# EAGLE board express 2 - 2020-01-19 (EAGLE 9.5.1), part 1 of 2
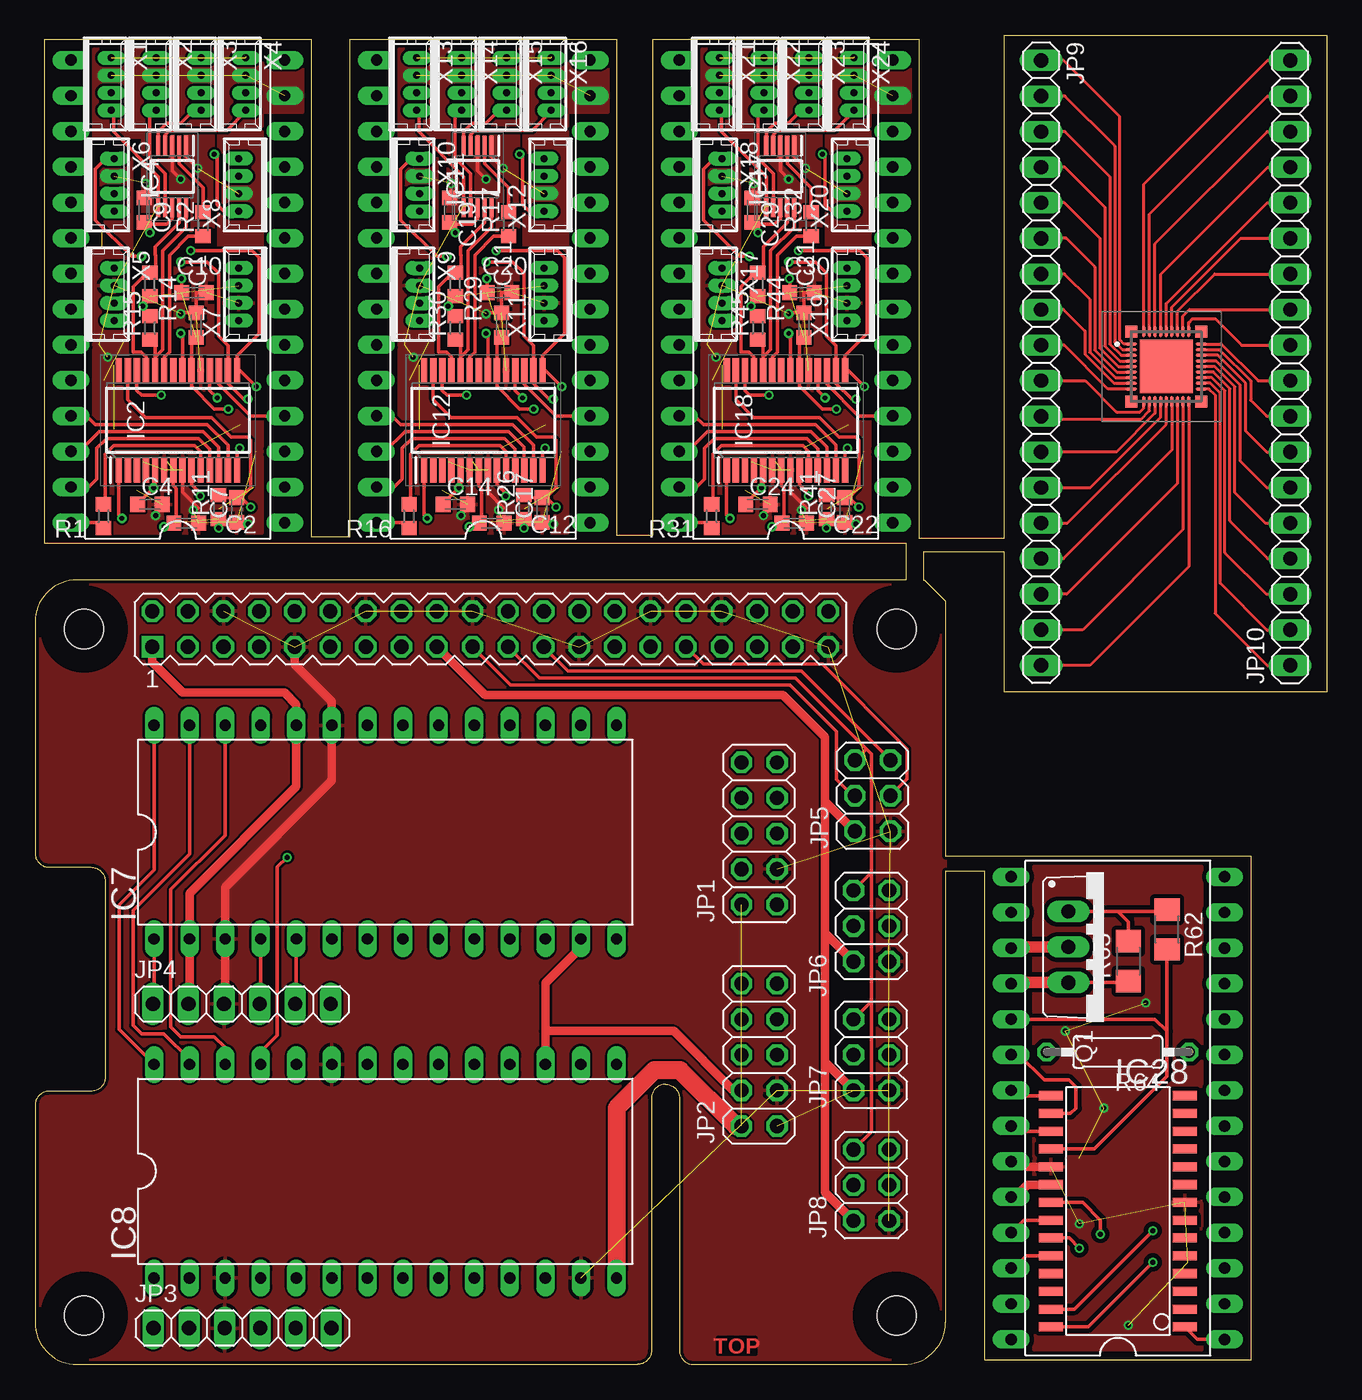
[diagram p0: board, top side]
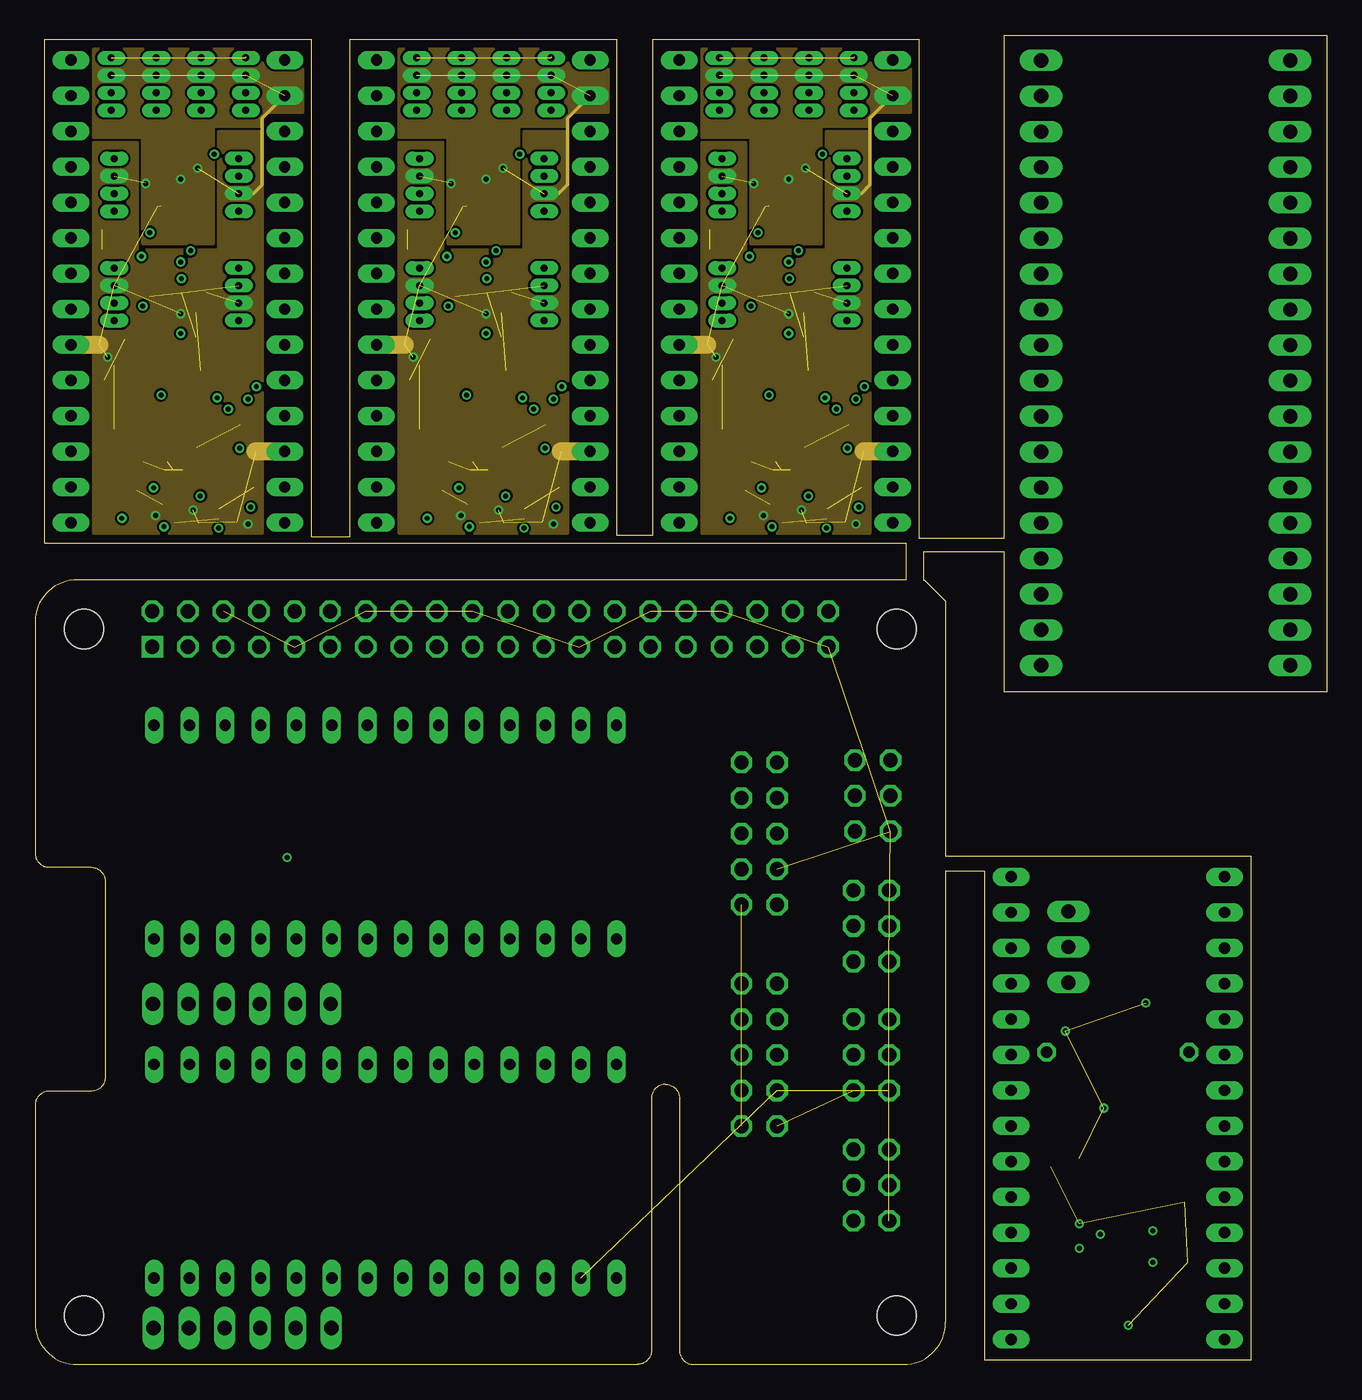
[diagram p1: board, inner layer GND]
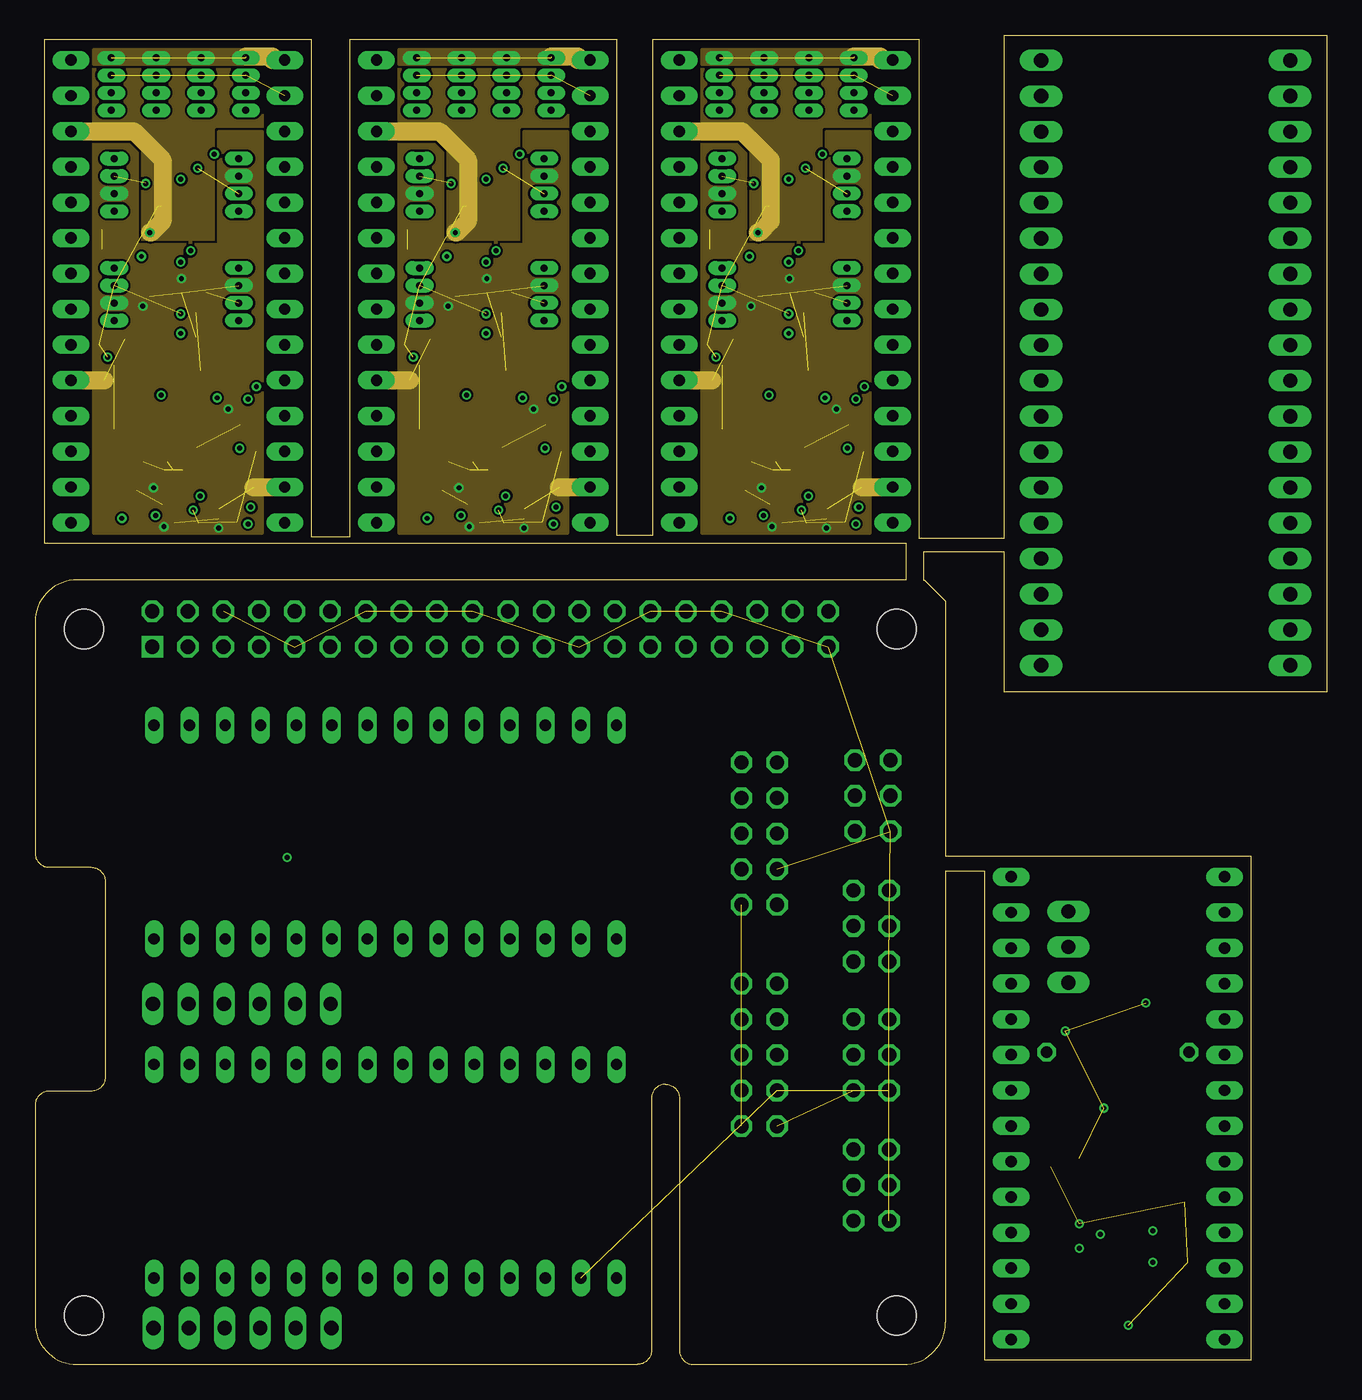
[diagram p2: board, inner layer POWER]
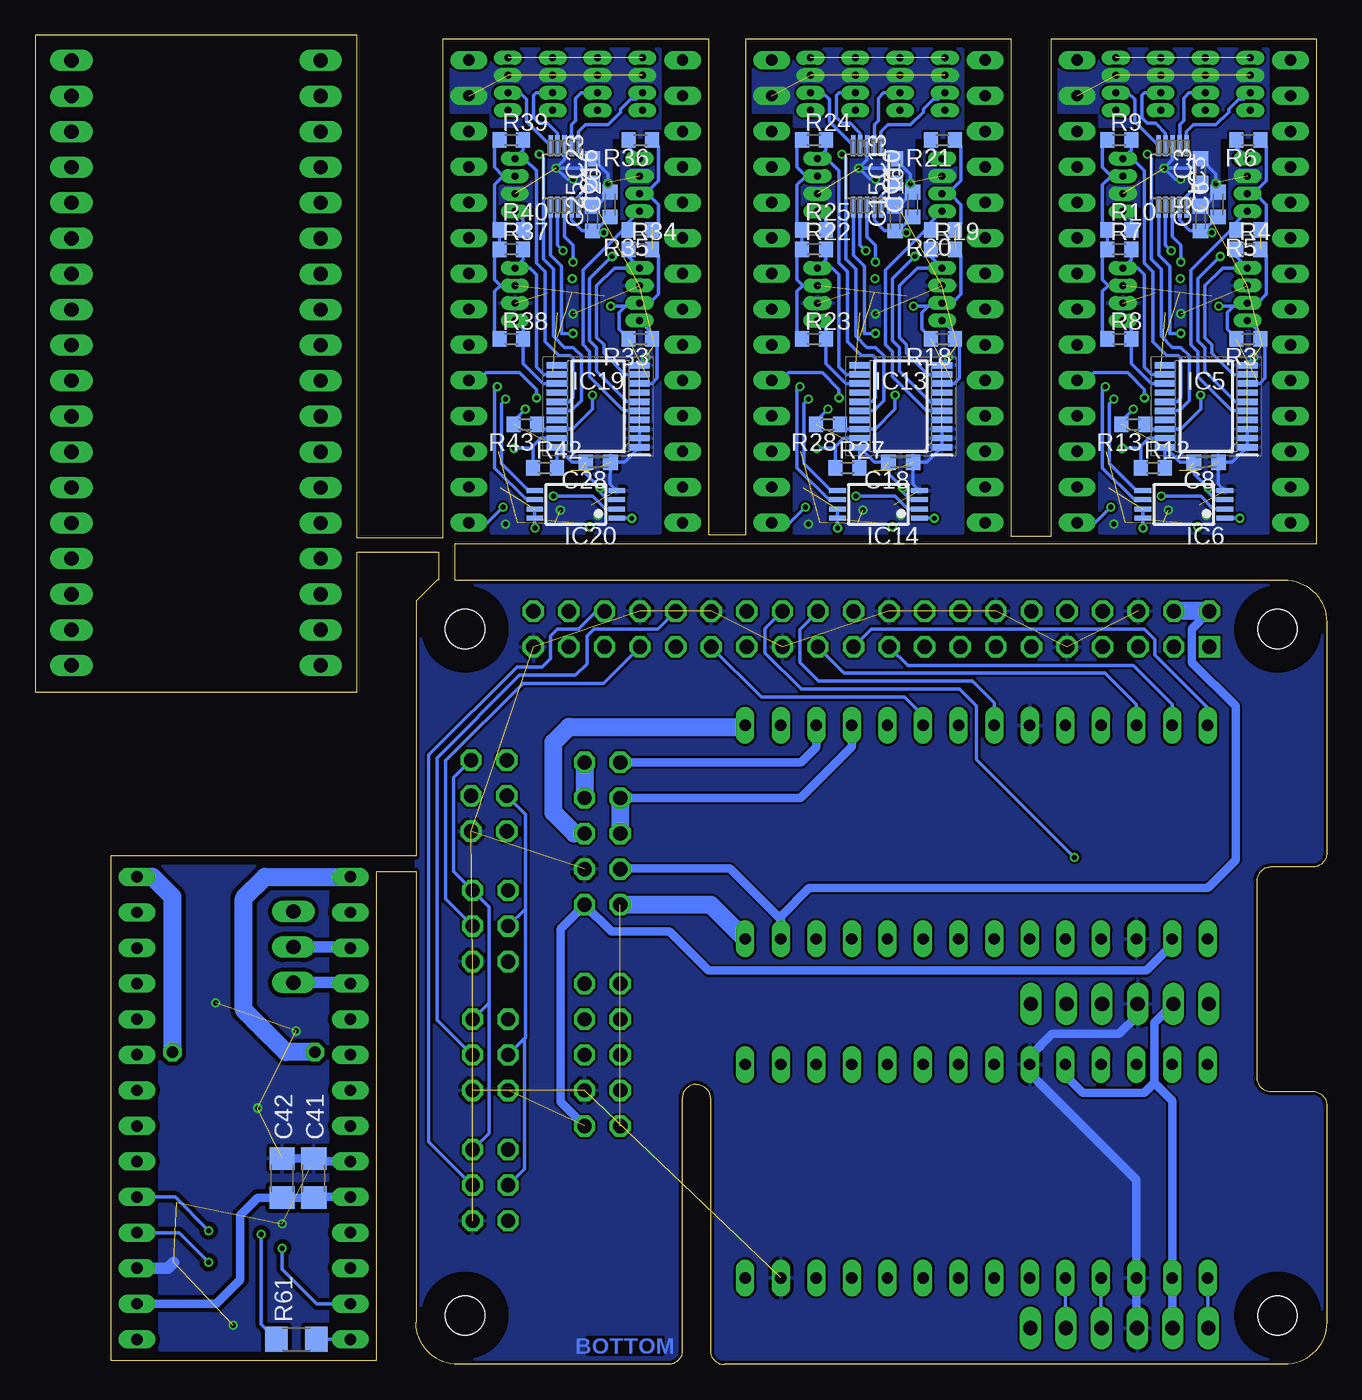
[diagram p3: board, bottom side, seen from below]

Size 92.2 x 94.9 mm. Coordinates in mm from the lower left corner, seen from the top.
Outline: 0,3 arc90 3,0 43,0 arc90 44,1 44,19 arc-90 45,20 arc-90 46,19 46,1 arc90 47,0 62,0 arc90 65,3 65,35.2 67.8,35.2 67.8,0.3 86.8,0.3 86.8,36.3 65,36.3 65,54.5 63.5,56 63.4,56 63.4,58 69.2,58 69.2,48 92.2,48 92.2,94.9 69.2,94.9 69.2,59 63.1,59 63.1,94.6 44.1,94.6 44.1,59.2 41.5,59.2 41.5,94.6 22.5,94.6 22.5,59.1 19.7,59.1 19.7,94.6 0.7,94.6 0.7,58.6 62.2,58.6 62.2,56 3,56 arc90 0,53 0,36.5 arc90 1,35.5 4,35.5 arc-90 5,34.5 5,20.5 arc-90 4,19.5 1,19.5 arc90 0,18.5 0,3
Copper layers (1+2*15+16): Top 0.035mm / dielectric 0.2mm / GND 0.035mm / dielectric 1mm / POWER 0.035mm / dielectric 0.2mm / Bottom 0.035mm
Design rules "ITEADstudio_DRC *": minimum track width 6mil, minimum drill 12mil, track to track 6mil, track to pad 6mil, pad to pad 6mil, via to via 6mil, smd to smd 0mil, copper to edge 10mil, drill to drill 10mil, minimum pad ring 10mil, minimum via ring 6mil, stop-mask expansion 2mil, vias tented up to drill 100mil, thermal gap 10mil
Holes 2.8 mm at 3.5,3.5 3.5,52.5 61.5,52.5 61.5,3.5
tRestrict: area 2,51 to 5,54; area 60,51 to 63,54; area 60,2 to 63,5; area 2,2 to 5,5
bRestrict: area 2,2 to 5,5; area 2,51 to 5,54; area 60,2 to 63,5; area 60,51 to 63,54

## Footprints (pad centres in the part's own frame; a part is rotated, then mirrored left to right if it is on the bottom)
C0603K = smd 1.05 x 1.08: 1 -0.875,0; 2 0.875,0
C1206 = smd 1.6 x 1.8: 1 -1.4,0; 2 1.4,0
DIL28-6 = drill 0.813 long: 1 -16.51,-7.62; 2 -13.97,-7.62; 3 -11.43,-7.62; 4 -8.89,-7.62; 5 -6.35,-7.62; 6 -3.81,-7.62; 7 -1.27,-7.62; 8 1.27,-7.62; 9 3.81,-7.62; 10 6.35,-7.62; 11 8.89,-7.62; 12 11.43,-7.62; 13 13.97,-7.62; 14 16.51,-7.62; 15 16.51,7.62; 16 13.97,7.62; 17 11.43,7.62; 18 8.89,7.62; 19 6.35,7.62; 20 3.81,7.62; 21 1.27,7.62; 22 -1.27,7.62; 23 -3.81,7.62; 24 -6.35,7.62; 25 -8.89,7.62; 26 -11.43,7.62; 27 -13.97,7.62; 28 -16.51,7.62
SOP65P780X200-28N = smd 1.8 x 0.45: 1 -3.55,4.225; 2 -3.55,3.575; 3 -3.55,2.925; 4 -3.55,2.275; 5 -3.55,1.625; 6 -3.55,0.975; 7 -3.55,0.325; 8 -3.55,-0.325; 9 -3.55,-0.975; 10 -3.55,-1.625; 11 -3.55,-2.275; 12 -3.55,-2.925; 13 -3.55,-3.575; 14 -3.55,-4.225; 15 3.55,-4.225; 16 3.55,-3.575; 17 3.55,-2.925; 18 3.55,-2.275; 19 3.55,-1.625; 20 3.55,-0.975; 21 3.55,-0.325; 22 3.55,0.325; 23 3.55,0.975; 24 3.55,1.625; 25 3.55,2.275; 26 3.55,2.925; 27 3.55,3.575; 28 3.55,4.225
SOP50P490X110-10N = smd 1.499 x 0.33: 1 -2.184,0.991; 2 -2.184,0.508; 3 -2.184,0; 4 -2.184,-0.508; 5 -2.184,-0.991; 6 2.184,-0.991; 7 2.184,-0.508; 8 2.184,0; 9 2.184,0.508; 10 2.184,0.991
SOP50P490X110-10N' = smd 1.4 x 0.3: 1 -2.2,1; 2 -2.2,0.5; 3 -2.2,0; 4 -2.2,-0.5; 5 -2.2,-1; 6 2.2,-1; 7 2.2,-0.5; 8 2.2,0; 9 2.2,0.5; 10 2.2,1
SOP65P640X110-20N = smd 1.475 x 0.45: 1 -2.938,2.925; 2 -2.938,2.275; 3 -2.938,1.625; 4 -2.938,0.975; 5 -2.938,0.325; 6 -2.938,-0.325; 7 -2.938,-0.975; 8 -2.938,-1.625; 9 -2.938,-2.275; 10 -2.938,-2.925; 11 2.938,-2.925; 12 2.938,-2.275; 13 2.938,-1.625; 14 2.938,-0.975; 15 2.938,-0.325; 16 2.938,0.325; 17 2.938,0.975; 18 2.938,1.625; 19 2.938,2.275; 20 2.938,2.925
TSSOP8 = smd 0.35 x 1.2: 1 -0.975,-2.925; 2 -0.325,-2.925; 3 0.325,-2.925; 4 0.975,-2.925; 5 0.975,2.925; 6 0.325,2.925; 7 -0.325,2.925; 8 -0.975,2.925
DSPIC33CK256MP503IM5 = smd 0.8 x 0.2: 1 -1.95,1.6; 2 -1.95,1.2; 3 -1.95,0.8; 4 -1.95,0.4; 5 -1.95,0; 6 -1.95,-0.4; 7 -1.95,-0.8; 8 -1.95,-1.2; 9 -1.95,-1.6; 19 3.05,-1.6; 20 3.05,-1.2; 21 3.05,-0.8; 22 3.05,-0.4; 23 3.05,0; 24 3.05,0.4; 25 3.05,0.8; 26 3.05,1.2; 27 3.05,1.6 | smd 0.2 x 0.8: 10 -1.05,-2.5; 11 -0.65,-2.5; 12 -0.25,-2.5; 13 0.15,-2.5; 14 0.55,-2.5; 15 0.95,-2.5; 16 1.35,-2.5; 17 1.75,-2.5; 18 2.15,-2.5; 28 2.15,2.5; 29 1.75,2.5; 30 1.35,2.5; 31 0.95,2.5; 32 0.55,2.5; 33 0.15,2.5; 34 -0.25,2.5; 35 -0.65,2.5; 36 -1.05,2.5 | smd 3.8 x 3.8: 37 0.55,0 | smd 0.85 x 0.85: 38 -1.95,-2.5; 39 -1.95,2.5; 40 3.05,2.5; 41 3.05,-2.5
SO28W = smd 0.65 x 1.7: 1 -7.62,-4.78; 2 -6.35,-4.78; 3 -5.08,-4.78; 4 -3.81,-4.78; 5 -2.54,-4.78; 6 -1.27,-4.78; 7 0,-4.78; 8 1.27,-4.78; 9 2.54,-4.78; 10 3.81,-4.78; 11 5.08,-4.78; 12 6.35,-4.78; 13 7.62,-4.78; 14 8.89,-4.78; 15 8.89,4.78; 16 7.62,4.78; 17 6.35,4.78; 18 5.08,4.78; 19 3.81,4.78; 20 2.54,4.78; 21 1.27,4.78; 22 0,4.78; 23 -1.27,4.78; 24 -2.54,4.78; 25 -3.81,4.78; 26 -5.08,4.78; 27 -6.35,4.78; 28 -7.62,4.78
2X05 = drill 1.016 octagon: 1 -5.08,-1.27; 2 -5.08,1.27; 3 -2.54,-1.27; 4 -2.54,1.27; 5 0,-1.27; 6 0,1.27; 7 2.54,-1.27; 8 2.54,1.27; 9 5.08,-1.27; 10 5.08,1.27
1X06 = drill 1.016 long: 1 -6.35,0; 2 -3.81,0; 3 -1.27,0; 4 1.27,0; 5 3.81,0; 6 6.35,0
2X03 = drill 1.016 octagon: 1 -2.54,-1.27; 2 -2.54,1.27; 3 0,-1.27; 4 0,1.27; 5 2.54,-1.27; 6 2.54,1.27
1X18 = drill 1.016 long: 1 -21.59,0; 2 -19.05,0; 3 -16.51,0; 4 -13.97,0; 5 -11.43,0; 6 -8.89,0; 7 -6.35,0; 8 -3.81,0; 9 -1.27,0; 10 1.27,0; 11 3.81,0; 12 6.35,0; 13 8.89,0; 14 11.43,0; 15 13.97,0; 16 16.51,0; 17 19.05,0; 18 21.59,0
PIN_20X2 = drill 1.016 square: 1 -24.13,-1.27 | drill 1.016 octagon: 2 -24.13,1.27; 3 -21.59,-1.27; 4 -21.59,1.27; 5 -19.05,-1.27; 6 -19.05,1.27; 7 -16.51,-1.27; 8 -16.51,1.27; 9 -13.97,-1.27; 10 -13.97,1.27; 11 -11.43,-1.27; 12 -11.43,1.27; 13 -8.89,-1.27; 14 -8.89,1.27; 15 -6.35,-1.27; 16 -6.35,1.27; 17 -3.81,-1.27; 18 -3.81,1.27; 19 -1.27,-1.27; 20 -1.27,1.27; 21 1.27,-1.27; 22 1.27,1.27; 23 3.81,-1.27; 24 3.81,1.27; 25 6.35,-1.27; 26 6.35,1.27; 27 8.89,-1.27; 28 8.89,1.27; 29 11.43,-1.27; 30 11.43,1.27; 31 13.97,-1.27; 32 13.97,1.27; 33 16.51,-1.27; 34 16.51,1.27; 35 19.05,-1.27; 36 19.05,1.27; 37 21.59,-1.27; 38 21.59,1.27; 39 24.13,-1.27; 40 24.13,1.27
TO220BV = drill 1.016 long: D 0,-2.54; G -2.54,-2.54; S 2.54,-2.54
R0603 = smd 1 x 1.1: 1 -0.85,0; 2 0.85,0
R1206 = smd 1.6 x 1.803: 1 -1.422,0; 2 1.422,0
0207/10 = drill 0.813 octagon: 1 -5.08,0; 2 5.08,0
53047-04 = drill 0.5 pad 0.698 long: 1 1.875,0.45; 2 0.625,0.45; 3 -0.625,0.45; 4 -1.875,0.45

## Placement (x,y rotation side)
C1  [C0603K]  11.5,74.2 90 top
C2  [C0603K]  10.8,60.05 0 top
C3  [C0603K]  9,85.2 90 bottom
C4  [C0603K]  8.2,61.4 0 top
C5  [C0603K]  9,81.8 90 bottom
C6  [C0603K]  7.75,82.8 90 bottom
C7  [C0603K]  14.4,61 90 top
C8  [C0603K]  8.6,64.4 180 bottom
C9  [C0603K]  7.8,82.4 270 top
C10  [C0603K]  11.35,76.5 0 top
C11  [C0603K]  33.3,74.2 90 top
C12  [C0603K]  32.6,60.05 0 top
C13  [C0603K]  30.8,85.2 90 bottom
C14  [C0603K]  30,61.4 0 top
C15  [C0603K]  30.8,81.8 90 bottom
C16  [C0603K]  29.55,82.8 90 bottom
C17  [C0603K]  36.2,61 90 top
C18  [C0603K]  30.4,64.4 180 bottom
C19  [C0603K]  29.6,82.4 270 top
C20  [C0603K]  33.15,76.5 0 top
C21  [C0603K]  54.9,74.2 90 top
C22  [C0603K]  54.2,60.05 0 top
C23  [C0603K]  52.4,85.2 90 bottom
C24  [C0603K]  51.6,61.4 0 top
C25  [C0603K]  52.4,81.8 90 bottom
C26  [C0603K]  51.15,82.8 90 bottom
C27  [C0603K]  57.8,61 90 top
C28  [C0603K]  52,64.4 180 bottom
C29  [C0603K]  51.2,82.4 270 top
C30  [C0603K]  54.75,76.5 0 top
C41  [C1206]  72.3,13.3 90 bottom
C42  [C1206]  74.55,13.3 90 bottom
IC1  [DIL28-6]  10.2,76.6 90 top
IC2  DSPIC33CK256MP502-I_SS  [SOP65P780X200-28N]  10.2,67.4 90 top
IC3  AD5624R  [SOP50P490X110-10N]  11,84.8 270 bottom
IC4  ADS1115  [SOP50P490X110-10N']  9.8,84.8 270 top
IC5  PCA9544APW,112  [SOP65P640X110-20N]  8.6,68.4 180 bottom
IC6  25AA040ST  [TSSOP8]  10.2,61.4 90 bottom
IC7  [DIL28-6]  25,38 0 top
IC8  [DIL28-6]  25,13.8 0 top
IC9  [DIL28-6]  32,76.6 90 top
IC10  AD5624R  [SOP50P490X110-10N]  32.8,84.8 270 bottom
IC11  ADS1115  [SOP50P490X110-10N']  31.6,84.8 270 top
IC12  DSPIC33CK256MP502-I_SS  [SOP65P780X200-28N]  32,67.4 90 top
IC13  PCA9544APW,112  [SOP65P640X110-20N]  30.4,68.4 180 bottom
IC14  25AA040ST  [TSSOP8]  32,61.4 90 bottom
IC15  [DIL28-6]  53.6,76.6 90 top
IC16  AD5624R  [SOP50P490X110-10N]  54.4,84.8 270 bottom
IC17  ADS1115  [SOP50P490X110-10N']  53.2,84.8 270 top
IC18  DSPIC33CK256MP502-I_SS  [SOP65P780X200-28N]  53.6,67.4 90 top
IC19  PCA9544APW,112  [SOP65P640X110-20N]  52,68.4 180 bottom
IC20  25AA040ST  [TSSOP8]  53.6,61.4 90 bottom
IC21  DSPIC33CK256MP503-I_M5  [DSPIC33CK256MP503IM5]  80.2,71.24 0 top
IC27  [DIL28-6]  77.3,18.3 90 top
IC28  PIC16F18857  [SO28W]  77.3,10.3 90 top
JP1  [2X05]  51.7,37.9 90 top
JP2  [2X05]  51.7,22.1 90 top
JP3  [1X06]  14.8,2.6 0 top
JP4  [1X06]  14.76,25.73 0 top
JP5  [2X03]  59.8,40.6 90 top
JP6  [2X03]  59.7,31.3 90 top
JP7  [2X03]  59.7,22.1 90 top
JP8  [2X03]  59.7,12.8 90 top
JP9  [1X18]  71.82,71.49 270 top
JP10  [1X18]  89.6,71.49 90 top
K1  PIN20X2  [PIN_20X2]  32.5,52.5 0 top
Q1  [TO220BV]  76.3,29.8 270 top
R1  [R0603]  4.9,60.55 270 top
R2  [R0603]  12,81.4 90 top
R3  [R0603]  5.6,73.2 180 bottom
R4  [R0603]  5.6,79.6 0 bottom
R5  [R0603]  5.6,81 180 bottom
R6  [R0603]  5.6,87.4 180 bottom
R7  [R0603]  14.8,79.6 0 bottom
R8  [R0603]  14.8,73.2 0 bottom
R9  [R0603]  14.8,87.4 0 bottom
R10  [R0603]  14.8,81 0 bottom
R11  [R0603]  13.1,61.2 90 top
R12  [R0603]  12.4,64 0 bottom
R13  [R0603]  13.8,67.1 180 bottom
R14  [R0603]  8.2,77.1 270 top
R15  [R0603]  8.2,74 90 top
R16  [R0603]  26.7,60.55 270 top
R17  [R0603]  33.8,81.4 90 top
R18  [R0603]  27.4,73.2 180 bottom
R19  [R0603]  27.4,79.6 0 bottom
R20  [R0603]  27.4,81 180 bottom
R21  [R0603]  27.4,87.4 180 bottom
R22  [R0603]  36.6,79.6 0 bottom
R23  [R0603]  36.6,73.2 0 bottom
R24  [R0603]  36.6,87.4 0 bottom
R25  [R0603]  36.6,81 0 bottom
R26  [R0603]  34.9,61.2 90 top
R27  [R0603]  34.2,64 0 bottom
R28  [R0603]  35.6,67.1 180 bottom
R29  [R0603]  30,77.1 270 top
R30  [R0603]  30,74 90 top
R31  [R0603]  48.3,60.55 270 top
R32  [R0603]  55.4,81.4 90 top
R33  [R0603]  49,73.2 180 bottom
R34  [R0603]  49,79.6 0 bottom
R35  [R0603]  49,81 180 bottom
R36  [R0603]  49,87.4 180 bottom
R37  [R0603]  58.2,79.6 0 bottom
R38  [R0603]  58.2,73.2 0 bottom
R39  [R0603]  58.2,87.4 0 bottom
R40  [R0603]  58.2,81 0 bottom
R41  [R0603]  56.5,61.2 90 top
R42  [R0603]  55.8,64 0 bottom
R43  [R0603]  57.2,67.1 180 bottom
R44  [R0603]  51.6,77.1 270 top
R45  [R0603]  51.6,74 90 top
R61  [R1206]  73.55,1.8 180 bottom
R62  [R1206]  80.8,31.05 270 top
R63  [R1206]  78.05,28.8 90 top
R64  [0207/10]  77.3,22.3 180 top
X1  53047-04  [53047-04]  5,91.4 270 top
X2  53047-04  [53047-04]  8.2,91.4 270 top
X3  53047-04  [53047-04]  11.4,91.4 270 top
X4  53047-04  [53047-04]  14.6,91.4 270 top
X5  53047-04  [53047-04]  5.2,76.4 270 top
X6  53047-04  [53047-04]  5.2,84.2 270 top
X7  53047-04  [53047-04]  15,76.4 90 top
X8  53047-04  [53047-04]  15,84.2 90 top
X9  53047-04  [53047-04]  27,76.4 270 top
X10  53047-04  [53047-04]  27,84.2 270 top
X11  53047-04  [53047-04]  36.8,76.4 90 top
X12  53047-04  [53047-04]  36.8,84.2 90 top
X13  53047-04  [53047-04]  26.8,91.4 270 top
X14  53047-04  [53047-04]  30,91.4 270 top
X15  53047-04  [53047-04]  33.2,91.4 270 top
X16  53047-04  [53047-04]  36.4,91.4 270 top
X17  53047-04  [53047-04]  48.6,76.4 270 top
X18  53047-04  [53047-04]  48.6,84.2 270 top
X19  53047-04  [53047-04]  58.4,76.4 90 top
X20  53047-04  [53047-04]  58.4,84.2 90 top
X21  53047-04  [53047-04]  48.4,91.4 270 top
X22  53047-04  [53047-04]  51.6,91.4 270 top
X23  53047-04  [53047-04]  54.8,91.4 270 top
X24  53047-04  [53047-04]  58,91.4 270 top

## Library data of the parts
C1-C30 C41 C42 = rcl; SPICEPREFIX: C
IC1 IC7-IC9 IC15 IC27 = ic-package
IC2 IC12 IC18 = dsPIC33CK256MP502-I_SS; DESCRIPTION: Digital Signal Processors & Controllers - DSP, DSC 16 Bit DSC, 256KB Flash, 24KB RAM, 100MHz, 28Pin, 3 OpAmp, 3 Comp, PTG, CAN-FD; HEIGHT: 2mm; MANUFACTURER_NAME: Microchip; MANUFACTURER_PART_NUMBER: dsPIC33CK256MP502-I/SS; RS_PART_NUMBER: 1793987P; RS_PRICE-STOCK: http://uk.rs-online.com/web/p/products/1793987P
IC3 IC10 IC16 = AD5624RBRMZ-3; DESCRIPTION: Analog Devices AD5624RBRMZ-3, 4-channel 12 bit Serial DAC, 10-Pin MSOP; HEIGHT: mm; MANUFACTURER_NAME: Analog Devices; MANUFACTURER_PART_NUMBER: AD5624RBRMZ-3; RS_PART_NUMBER: 8065373P; RS_PRICE-STOCK: http://uk.rs-online.com/web/p/products/8065373P
IC4 IC11 IC17 = ADS1115BQDGSRQ1; DESCRIPTION: Automotive 16-Bit 860SPS 4-Ch Delta-Sigma ADC With PGA, Oscillator, VREF, Comparator, and I2C; HEIGHT: 1.1mm; MANUFACTURER_NAME: Texas Instruments; MANUFACTURER_PART_NUMBER: ADS1115BQDGSRQ1
IC5 IC13 IC19 = PCA9544APW_112; DESCRIPTION: NXP PCA9544APW,112, Multiplexer Single 4:1, 20-Pin TSSOP; HEIGHT: 1.1mm; MANUFACTURER_NAME: Nexperia; MANUFACTURER_PART_NUMBER: PCA9544APW,112; RS_PART_NUMBER: 7258852P; RS_PRICE-STOCK: http://uk.rs-online.com/web/p/products/7258852P
IC6 IC14 IC20 = microchip; MPN: 25AA040A-I/MS; OC_FARNELL: 1331345; OC_NEWARK: 35M0801
IC21 = dsPIC33CK256MP503-I_M5; DESCRIPTION: Digital Signal Processors & Controllers - DSP, DSC 16 Bit DSC, 256KB Flash, 24KB RAM, 100MHz, 28Pin, 3 OpAmp, 3 Comp, PTG, CAN-FD; HEIGHT: 0mm; MANUFACTURER_NAME: Microchip; MANUFACTURER_PART_NUMBER: dsPIC33CK256MP503-I/M5; MOUSER_PART_NUMBER: 579-PIC33CK256MP503I; MOUSER_PRICE-STOCK: https://www.mouser.com/Search/Refine.aspx?Keyword=579-PIC33CK256MP503I; RS_PART_NUMBER: 1793989P; RS_PRICE-STOCK: http://uk.rs-online.com/web/p/products/1793989P
IC28 = microchip; MF: MICROCHIP; MPN: PIC16F870-I/SO; OC_FARNELL: 9760946; OC_NEWARK: 61K3457
JP1-JP8 = pinhead
JP9 JP10 = adafruit
K1 = FLYFISH; OC_FARNELL: unknown
Q1 = transistor-power
R1-R45 R61-R64 = rcl; SPICEPREFIX: R
X1-X24 = con-molex; MF: WALDOM/MOLEX; MPN: 53047-0410; OC_FARNELL: 9733060; OC_NEWARK: 38C9900

## Nets
0V: IC7.18 JP1.6 JP1.8
+3V1: IC7.2 IC7.24 IC8.2 IC8.24 JP1.1 JP2.1 JP3.2 JP4.2 JP5.2 JP6.2 JP7.2 JP8.2 K1.1 K1.17
+3V2: C11.1 C12.1 C14.1 C18.2 C20.1 IC9.2 IC9.24 IC12.5 IC12.7 IC12.20 IC13.20 IC14.3 IC14.7 IC14.8 R18.2 R19.2 R20.1 R21.1 R22.1 R23.1 R24.1 R25.1 R26.1 R27.2 R28.2 R29.2 R30.2 X9.2 X10.2 X11.2 X12.2
+3V3: C1.1 C2.1 C4.1 C8.2 C10.1 IC1.2 IC1.24 IC2.5 IC2.7 IC2.20 IC5.20 IC6.3 IC6.7 IC6.8 R3.2 R4.2 R5.1 R6.1 R7.1 R8.1 R9.1 R10.1 R11.1 R12.2 R13.2 R14.2 R15.2 X5.2 X6.2 X7.2 X8.2
+3V4: C21.1 C22.1 C24.1 C28.2 C30.1 IC15.2 IC15.24 IC18.5 IC18.7 IC18.20 IC19.20 IC20.3 IC20.7 IC20.8 R33.2 R34.2 R35.1 R36.1 R37.1 R38.1 R39.1 R40.1 R41.1 R42.2 R43.2 R44.2 R45.2 X17.2 X18.2 X19.2 X20.2
+5V: C5.1 C6.1 C9.2 IC1.17 IC3.9 IC4.8
+5V1: IC7.13 IC8.17 JP1.4 JP2.4 K1.2 K1.4
+5V2: C15.1 C16.1 C19.2 IC9.17 IC10.9 IC11.8
+5V3: C25.1 C26.1 C29.2 IC15.17 IC16.9 IC17.8
+5V5: IC27.13
+12V: IC1.14 X1.4 X2.4 X3.4 X4.4
+12V1: IC7.14 IC8.14 JP1.2 JP2.2
+12V2: IC9.14 X13.4 X14.4 X15.4 X16.4
+12V3: IC15.14 X21.4 X22.4 X23.4 X24.4
+12V5: IC27.14 R64.1
ADC_RDY: IC2.23 R2.1
ADC_RDY1: IC12.23 R17.1
ADC_RDY2: IC18.23 R32.1
ADC_SCL: IC2.24 IC4.10 R15.1
ADC_SCL1: IC11.10 IC12.24 R30.1
ADC_SCL2: IC17.10 IC18.24 R45.1
ADC_SDA: IC2.25 IC4.9 R14.1
ADC_SDA1: IC11.9 IC12.25 R29.1
ADC_SDA2: IC17.9 IC18.25 R44.1
CE0: IC7.22 K1.24
CE1: IC8.25 K1.26
GND: C1.2 C2.2 C3.2 C4.2 C5.2 C6.2 C7.1 C8.1 C9.1 C10.2 IC1.3 IC1.13 IC1.23 IC2.6 IC2.8 IC2.19 IC3.3 IC4.1 IC4.3 IC5.1 IC5.2 IC5.3 IC5.10 IC6.4 X1.3 X2.3 X3.3 X4.3 X5.3 X6.3 X7.3 X8.3
GND1: IC7.3 IC7.23 IC8.3 IC8.13 IC8.23 JP1.3 JP2.3 JP3.3 JP4.3 JP5.1 JP6.1 JP7.1 JP8.1 K1.6 K1.9 K1.14 K1.20 K1.25 K1.30 K1.34 K1.39
GND2: C11.2 C12.2 C13.2 C14.2 C15.2 C16.2 C17.1 C18.1 C19.1 C20.2 IC9.3 IC9.13 IC9.23 IC10.3 IC11.1 IC11.3 IC12.6 IC12.8 IC12.19 IC13.1 IC13.2 IC13.3 IC13.10 IC14.4 X9.3 X10.3 X11.3 X12.3 X13.3 X14.3 X15.3 X16.3
GND3: C21.2 C22.2 C23.2 C24.2 C25.2 C26.2 C27.1 C28.1 C29.1 C30.2 IC15.3 IC15.13 IC15.23 IC16.3 IC17.1 IC17.3 IC18.6 IC18.8 IC18.19 IC19.1 IC19.2 IC19.3 IC19.10 IC20.4 X17.3 X18.3 X19.3 X20.3 X21.3 X22.3 X23.3 X24.3
GND5: C41.2 C42.2 IC27.3 IC27.23 IC28.8 IC28.19
GPIO6: JP5.3 K1.31
GPIO12: JP7.3 K1.32
GPIO13: JP6.3 K1.33
GPIO16: JP8.3 K1.36
GPIO26: K1.37
I2C_SCL: IC2.26 IC5.18 R13.1
I2C_SCL1: IC12.26 IC13.18 R28.1
I2C_SCL2: IC18.26 IC19.18 R43.1
I2C_SDA: IC2.14 IC5.19 R12.1
I2C_SDA1: IC12.14 IC13.19 R27.1
I2C_SDA2: IC18.14 IC19.19 R42.1
ICSP_MCLR: C7.2 IC1.1 IC2.27 R11.2
ICSP_MCLR1: IC8.1 JP3.1
ICSP_MCLR2: IC7.1 JP4.1
ICSP_MCLR3: C17.2 IC9.1 IC12.27 R26.2
ICSP_MCLR4: C27.2 IC15.1 IC18.27 R41.2
ICSP_MCLR6: IC27.1 IC28.1
ICSP_PGC: IC1.5 IC2.18
ICSP_PGC1: IC8.5 JP3.5
ICSP_PGC2: IC7.5 JP4.5
ICSP_PGC3: IC9.5 IC12.18
ICSP_PGC4: IC15.5 IC18.18
ICSP_PGD: IC1.4 IC2.17
ICSP_PGD1: IC8.4 JP3.4
ICSP_PGD2: IC7.4 JP4.4
ICSP_PGD3: IC9.4 IC12.17
ICSP_PGD4: IC15.4 IC18.17
ICSP_PGD6: IC27.4 IC28.28
MISO: IC7.28 IC8.28 JP5.6 JP6.6 JP7.6 JP8.6 K1.21
MOSI: IC7.27 IC8.27 JP5.4 JP6.4 JP7.4 JP8.4 K1.19
N$1: C3.1 IC3.10
N$2: JP3.6
N$3: IC3.1 X1.2
N$4: IC11.2 R17.2
N$5: IC11.5 X15.1
N$6: JP4.6
N$7: C13.1 IC10.10
N$8: IC3.2 X2.2
N$9: IC3.4 X3.2
N$10: IC4.2 R2.2
N$11: IC10.1 X13.2
N$12: IC4.5 X3.1
N$13: IC3.5 X4.2
N$14: IC5.5 R5.2 X6.1
N$15: IC5.6 R6.2 X6.4
N$16: IC5.8 R3.1 X5.1
N$17: IC5.9 R4.1 X5.4
N$18: IC5.12 R7.2 X7.1
N$19: IC5.13 R8.2 X7.4
N$20: IC5.15 R9.2 X8.1
N$21: IC5.16 R10.2 X8.4
N$22: IC4.7 X2.1
N$23: IC10.2 X14.2
N$24: IC4.6 X1.1
N$25: IC4.4 X4.1
N$26: IC10.4 X15.2
N$27: IC10.5 X16.2
N$28: IC13.12 R22.2 X11.1
N$29: IC13.13 R23.2 X11.4
N$30: IC13.15 R24.2 X12.1
N$31: IC13.16 R25.2 X12.4
N$32: IC13.5 R20.2 X10.1
N$33: IC13.6 R21.2 X10.4
N$34: IC13.8 R18.1 X9.1
N$35: IC13.9 R19.1 X9.4
N$36: IC11.7 X14.1
N$37: IC11.6 X13.1
N$38: IC11.4 X16.1
N$39: IC17.2 R32.2
N$40: IC17.5 X23.1
N$41: C23.1 IC16.10
N$42: IC16.1 X21.2
N$43: IC16.2 X22.2
N$44: IC16.4 X23.2
N$45: IC16.5 X24.2
N$46: IC19.12 R37.2 X19.1
N$47: IC19.13 R38.2 X19.4
N$48: IC19.15 R39.2 X20.1
N$49: IC19.16 R40.2 X20.4
N$50: IC19.5 R35.2 X18.1
N$51: IC19.6 R36.2 X18.4
N$52: IC19.8 R33.1 X17.1
N$53: IC19.9 R34.1 X17.4
N$54: IC17.7 X22.1
N$55: IC17.6 X21.1
N$56: IC17.4 X24.1
N$57: IC21.1 JP9.1
N$58: IC21.22 JP10.4
N$59: IC21.19 JP10.1
N$60: IC21.20 JP10.2
N$61: IC21.21 JP10.3
N$62: IC21.2 JP9.2
N$63: IC21.3 JP9.3
N$64: IC21.4 JP9.4
N$65: IC21.5 JP9.5
N$66: IC21.6 JP9.6
N$67: IC21.7 JP9.7
N$68: IC21.8 JP9.8
N$69: IC21.9 JP9.9
N$70: IC21.10 JP9.10
N$71: IC21.11 JP9.11
N$72: IC21.12 JP9.12
N$73: IC21.13 JP9.13
N$74: IC21.14 JP9.14
N$75: IC27.25 IC28.22
N$76: IC28.21 R61.2
N$79: IC27.5 IC28.27
N$80: Q1.G R62.1 R63.2
N$81: IC27.21 IC28.15
N$82: IC21.15 JP9.15
N$83: IC21.16 JP9.16
N$84: IC21.17 JP9.17
N$85: IC21.18 JP9.18
N$86: IC21.23 JP10.5
N$87: IC21.24 JP10.6
N$88: IC21.25 JP10.7
N$89: IC21.26 JP10.8
N$90: IC21.27 JP10.9
N$91: IC21.28 JP10.10
N$92: IC21.29 JP10.11
N$93: IC21.30 JP10.12
N$94: IC21.31 JP10.13
N$95: IC21.32 JP10.14
N$96: IC21.33 JP10.15
N$97: IC21.34 JP10.16
N$98: IC21.35 JP10.17
N$99: IC21.36 JP10.18
SCLK: IC7.26 IC8.26 JP5.5 JP6.5 JP7.5 JP8.5 K1.23
SPI2_CLK: IC2.15 IC3.7 IC6.6
SPI2_CLK1: IC10.7 IC12.15 IC14.6
SPI2_CLK2: IC16.7 IC18.15 IC20.6
SPI2_DAC_SYNC: IC2.21 IC3.6
SPI2_DAC_SYNC1: IC10.6 IC12.21
SPI2_DAC_SYNC2: IC16.6 IC18.21
SPI2_EE_SS: IC2.1 IC6.1
SPI2_EE_SS1: IC12.1 IC14.1
SPI2_EE_SS2: IC18.1 IC20.1
SPI2_MISO: IC2.9 IC6.2
SPI2_MISO1: IC12.9 IC14.2
SPI2_MISO2: IC18.9 IC20.2
SPI2_MOSI: IC2.16 IC3.8 IC6.5
SPI2_MOSI1: IC10.8 IC12.16 IC14.5
SPI2_MOSI2: IC16.8 IC18.16 IC20.5
SPI_CLK: IC1.26 IC2.12
SPI_CLK1: IC9.26 IC12.12
SPI_CLK2: IC15.26 IC18.12
SPI_CLK4: IC27.26 IC28.24
SPI_IN: IC1.27 IC2.11
SPI_IN1: IC9.27 IC12.11
SPI_IN2: IC15.27 IC18.11
SPI_IN4: IC27.27 IC28.23
SPI_OUT: IC1.28 R1.2
SPI_OUT1: IC9.28 R16.2
SPI_OUT2: IC15.28 R31.2
SPI_OUT4: IC27.28 R61.1
SPI_OUT_R: IC2.10 R1.1
SPI_OUT_R1: IC12.10 R16.1
SPI_OUT_R2: IC18.10 R31.1
SPI_SS: IC1.25 IC2.13
SPI_SS1: IC9.25 IC12.13
SPI_SS2: IC15.25 IC18.13
SPI_SS4: IC27.22 IC28.17
STROBE+: JP1.7 JP1.9
STROBE+_RES: IC7.15 JP1.5
STROBE+_RES1: IC27.15 R64.2
STROBE-: IC7.17 JP1.10
STROBE-1: IC27.17 Q1.D
STROBE_0V: IC27.18 Q1.S R63.1
STROBE_GATE: IC7.19
STROBE_GATE1: IC27.19 IC28.18 R62.2
STROBE_TRIG_IN: IC7.20 K1.29
STROBE_TRIG_IN1: IC27.20 IC28.16
V+: C41.1 C42.1 IC27.2 IC27.24 IC28.20